# EAGLE board Sche1-panelized (EAGLE 7.2.0)
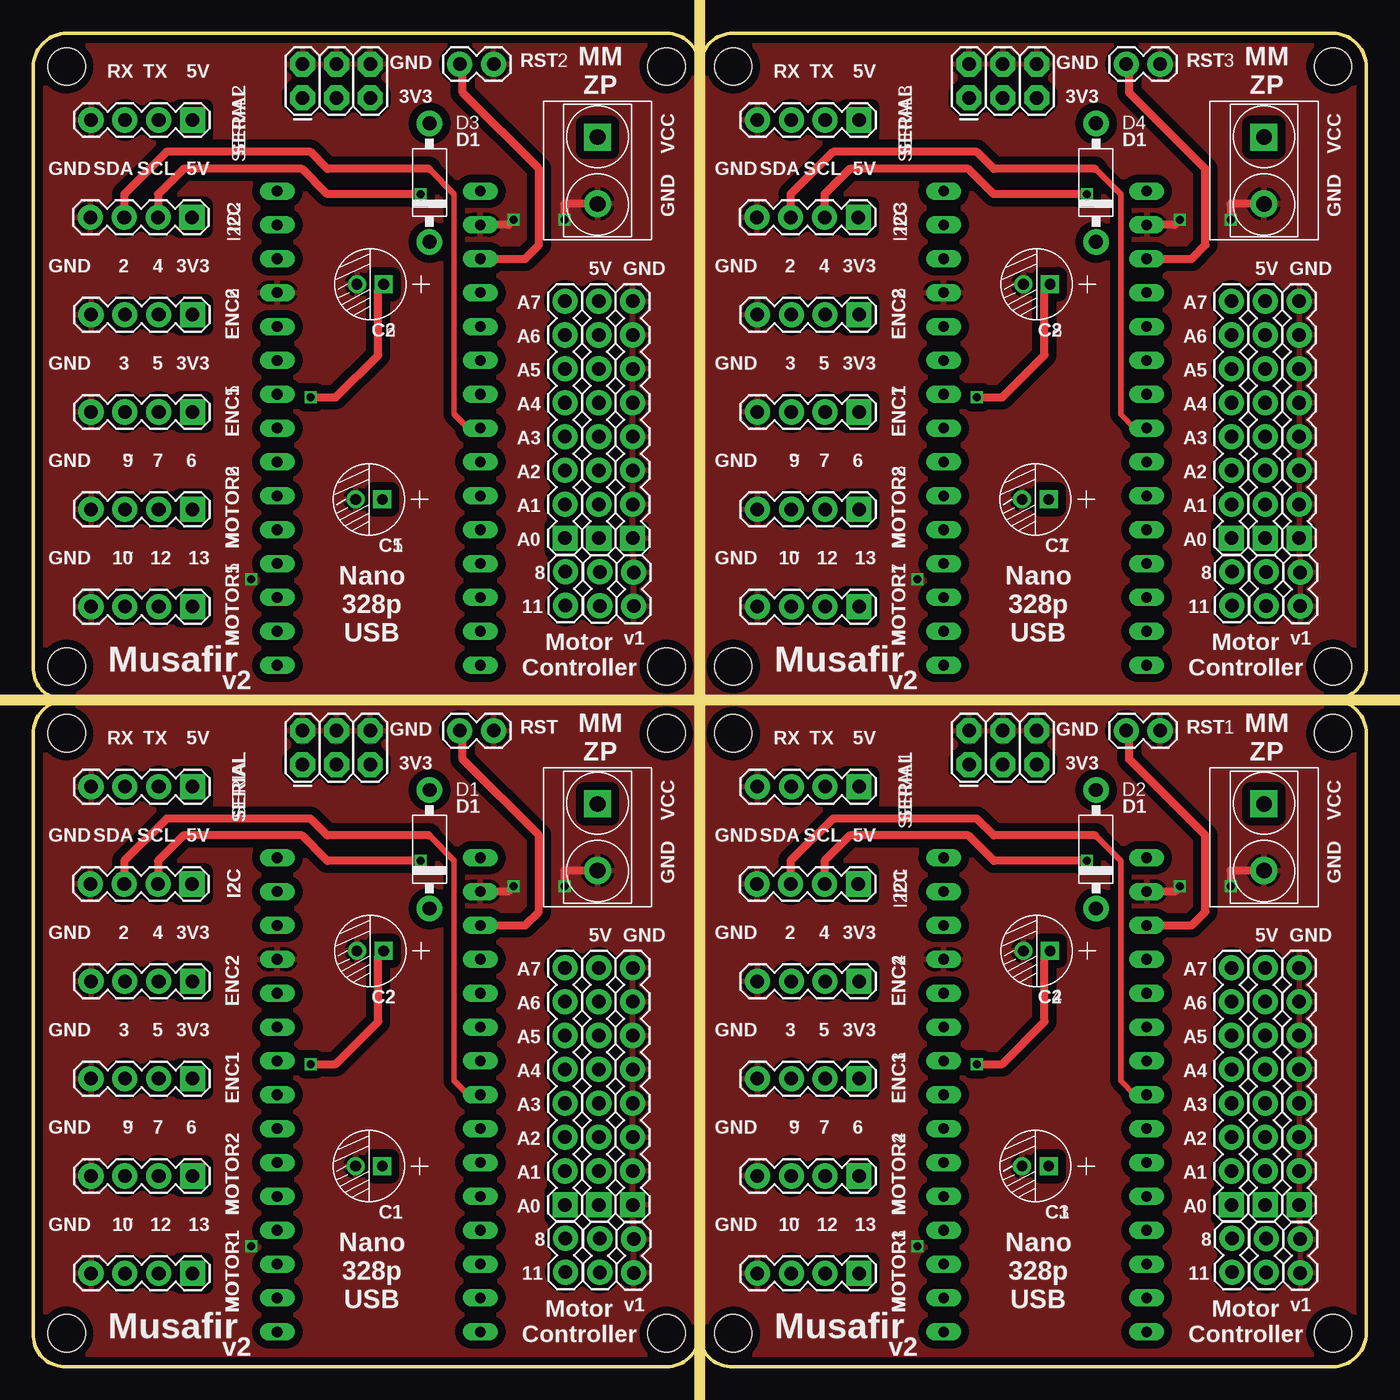
[diagram p0: board, top side]
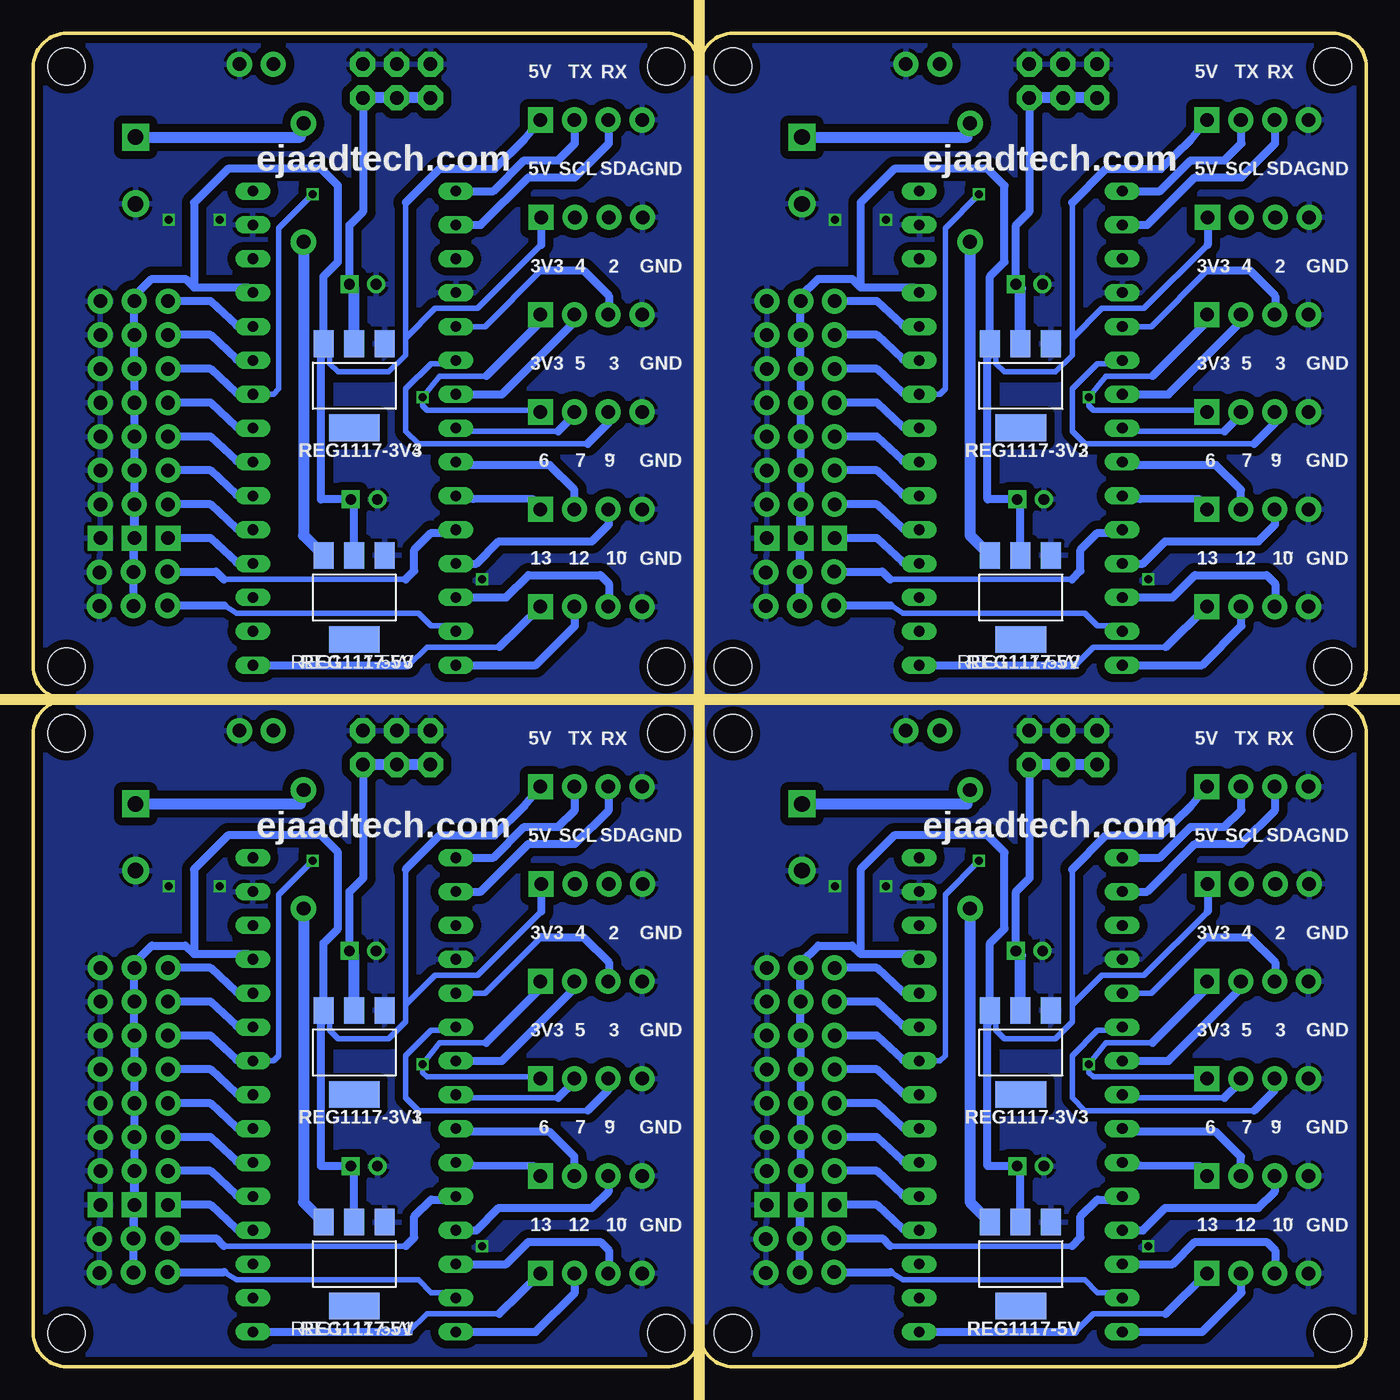
[diagram p1: board, bottom side, seen from below]

Size 100 x 100 mm. Coordinates in mm from the lower left corner, seen from the top.
Outline: 2.5,50 arc90 0,47.5 0,2.5 arc90 2.25,0 47.5,0 arc90 50,2.5 arc90 52.25,0 97.5,0 arc90 100,2.5 100,47.5 arc90 97.5,50 arc90 100,52.5 100,97.5 arc90 97.5,100 52.5,100 arc90 50,97.5 arc90 47.5,100 2.5,100 arc90 0,97.5 0,52.5 arc90 2.25,50 2.5,50
Copper layers (1*16): Top 0.035mm / dielectric 1.5mm / Bottom 0.035mm
Design rules "SeeedStudio_2layer_DRU_no_angle_20140221": minimum track width 6mil, minimum drill 12mil, track to track 6mil, track to pad 6mil, pad to pad 6mil, via to via 6mil, smd to smd 0mil, copper to edge 10mil, drill to drill 10mil, minimum pad ring 10mil, minimum via ring 6mil, stop-mask expansion 2mil, vias tented up to drill 100mil, thermal gap 10mil
Holes 2.8 mm at 2.5,2.5 47.5,2.5 2.5,47.5 47.5,47.5 52.5,2.5 97.5,2.5 52.5,47.5 97.5,47.5 2.5,52.5 47.5,52.5 2.5,97.5 47.5,97.5 52.5,52.5 97.5,52.5 52.5,97.5 97.5,97.5
Milling: 2 lines

## Footprints (pad centres in the part's own frame; a part is rotated, then mirrored left to right if it is on the bottom)
2X3 = drill 1.016 pad 1.88 octagon: 1 0,0; 2 0,2.54; 3 2.54,0; 4 2.54,2.54; 5 5.08,0; 6 5.08,2.54
1X02 = drill 1.016 pad 1.88: 1 0,0; 2 2.54,0
1X08 = drill 1.016 pad 1.88 square: 1 0,0 | drill 1.016 pad 1.88: 2 2.54,0; 3 5.08,0; 4 7.62,0; 5 10.16,0; 6 12.7,0; 7 15.24,0; 8 17.78,0
PC-D5.3MM = drill 0.8 pad 1.35 square: + -1,0 | drill 0.8 pad 1.35: - 1,0
DO-41 = drill 1.041 pad 1.905: 1 -4.445,0; 2 4.445,0
1X04 = drill 1.016 pad 1.88 square: 1 0,0 | drill 1.016 pad 1.88: 2 2.54,0; 3 5.08,0; 4 7.62,0
H2-5.0-10.5X8.0MM = drill 1.168 pad 2.032 square: 1 0,2.5 | drill 1.168 pad 2.032: 2 0,-2.5
SOT223 = smd 1.499 x 2.007: 1 -2.261,-3.15; 2 0.025,-3.15; 3 2.311,-3.15 | smd 3.81 x 2.007: 4 0,3.15
NANO = drill 0.8 long: 3.3V -10.16,24.13; 5V -10.16,-1.27; A0 -10.16,19.05; A1 -10.16,16.51; A2 -10.16,13.97; A3 -10.16,11.43; A4 -10.16,8.89; A5 -10.16,6.35; A6 -10.16,3.81; A7 -10.16,1.27; AREF -10.16,21.59; D2 5.08,1.27; D3 5.08,3.81; D4 5.08,6.35; D5 5.08,8.89; D6 5.08,11.43; D7 5.08,13.97; D8 5.08,16.51; D9 5.08,19.05; D10 5.08,21.59; D11 5.08,24.13; D12 5.08,26.67; D13 -10.16,26.67; GND -10.16,-6.35; GND1 5.08,-1.27; RAW -10.16,-8.89; RST -10.16,-3.81; RST1 5.08,-3.81; RX1 5.08,-6.35; TX0 5.08,-8.89

## Placement (x,y rotation side)
3V3_GND  FEMALE 2x3  [2X3]  20.2,45.16 0 top
3V3_GND1  FEMALE 2x3  [2X3]  70.2,45.16 0 top
3V3_GND2  FEMALE 2x3  [2X3]  20.2,95.16 0 top
3V3_GND3  FEMALE 2x3  [2X3]  70.2,95.16 0 top
5V1  [1X02]  42.5,9.6 270 top
5V2  [1X08]  42.43,12.13 90 top
5V3  [1X02]  92.5,9.6 270 top
5V4  [1X08]  92.43,12.13 90 top
5V5  [1X02]  42.5,59.6 270 top
5V6  [1X08]  42.43,62.13 90 top
5V7  [1X02]  92.5,59.6 270 top
5V8  [1X08]  92.43,62.13 90 top
ANALOG  [1X08]  39.89,12.13 90 top
ANALOG1  [1X08]  89.89,12.13 90 top
ANALOG2  [1X08]  39.89,62.13 90 top
ANALOG3  [1X08]  89.89,62.13 90 top
C1  100uf  [PC-D5.3MM]  25.19,15.04 180 top
C2  100uf  [PC-D5.3MM]  25.28,31.18 180 top
C3  100uf  [PC-D5.3MM]  75.19,15.04 180 top
C4  100uf  [PC-D5.3MM]  75.28,31.18 180 top
C5  100uf  [PC-D5.3MM]  25.19,65.04 180 top
C6  100uf  [PC-D5.3MM]  25.28,81.19 180 top
C7  100uf  [PC-D5.3MM]  75.19,65.04 180 top
C8  100uf  [PC-D5.3MM]  75.28,81.19 180 top
D1  1N4004  [DO-41]  29.73,38.8 270 top
D2  1N4004  [DO-41]  79.73,38.8 270 top
D3  1N4004  [DO-41]  29.73,88.81 270 top
D4  1N4004  [DO-41]  79.73,88.81 270 top
D8D1  [1X02]  89.93,9.63 270 top
D8D2  [1X02]  39.93,59.63 270 top
D8D3  [1X02]  89.93,59.63 270 top
D8D11  [1X02]  39.93,9.63 270 top
ENC1  [1X04]  11.95,21.6 180 top
ENC2  [1X04]  11.95,28.9 180 top
ENC3  [1X04]  61.95,21.6 180 top
ENC4  [1X04]  61.95,28.9 180 top
ENC5  [1X04]  11.95,71.6 180 top
ENC6  [1X04]  11.95,78.9 180 top
ENC7  [1X04]  61.95,71.6 180 top
ENC8  [1X04]  61.95,78.9 180 top
GND1  [1X02]  45.04,9.57 270 top
GND2  [1X08]  44.97,12.13 90 top
GND3  [1X02]  95.04,9.57 270 top
GND4  [1X08]  94.97,12.13 90 top
GND5  [1X02]  45.04,59.57 270 top
GND6  [1X08]  44.97,62.13 90 top
GND7  [1X02]  95.04,59.57 270 top
GND8  [1X08]  94.97,62.13 90 top
I2C  [1X04]  11.9,36.2 180 top
I2C1  [1X04]  61.9,36.2 180 top
I2C2  [1X04]  11.9,86.2 180 top
I2C3  [1X04]  61.9,86.2 180 top
MOTOR1  [1X04]  11.95,7 180 top
MOTOR2  [1X04]  11.95,14.3 180 top
MOTOR3  [1X04]  61.95,7 180 top
MOTOR4  [1X04]  61.95,14.3 180 top
MOTOR5  [1X04]  11.95,57 180 top
MOTOR6  [1X04]  11.95,64.3 180 top
MOTOR7  [1X04]  61.95,57 180 top
MOTOR8  [1X04]  61.95,64.3 180 top
POWER  GREEN-2P-5.0  [H2-5.0-10.5X8.0MM]  42.33,39.71 0 top
POWER1  GREEN-2P-5.0  [H2-5.0-10.5X8.0MM]  92.33,39.71 0 top
POWER2  GREEN-2P-5.0  [H2-5.0-10.5X8.0MM]  42.33,89.71 0 top
POWER3  GREEN-2P-5.0  [H2-5.0-10.5X8.0MM]  92.33,89.71 0 top
REG1117-3V1  REG1117  [SOT223]  75.92,23.57 180 bottom
REG1117-3V2  REG1117  [SOT223]  25.92,73.56 180 bottom
REG1117-3V3  REG1117  [SOT223]  25.92,23.57 180 bottom
REG1117-3V4  REG1117  [SOT223]  75.92,73.56 180 bottom
REG1117-5V  REG1117  [SOT223]  25.92,7.69 180 bottom
REG1117-5V1  REG1117  [SOT223]  75.92,7.69 180 bottom
REG1117-5V2  REG1117  [SOT223]  25.92,57.69 180 bottom
REG1117-5V3  REG1117  [SOT223]  75.92,57.69 180 bottom
RST  [1X02]  32,47.7 0 top
RST1  [1X02]  82,47.7 0 top
RST2  [1X02]  32,97.69 0 top
RST3  [1X02]  82,97.69 0 top
SERIAL  [1X04]  11.95,43.5 180 top
SERIAL1  [1X04]  61.95,43.5 180 top
SERIAL2  [1X04]  11.95,93.5 180 top
SERIAL3  [1X04]  61.95,93.5 180 top
U$1  NANO  [NANO]  23.38,29.28 180 top
U$2  NANO  [NANO]  73.38,29.28 180 top
U$3  NANO  [NANO]  23.38,79.28 180 top
U$4  NANO  [NANO]  73.38,79.28 180 top

## Library data of the parts
3V3_GND 3V3_GND1-3V3_GND3 = SparkFun-Connectors; PROD_ID: CONN-11566
5V1 5V3 5V5 5V7 D8D1-D8D3 D8D11 GND1 GND3 GND5 GND7 RST RST1-RST3 = SparkFun-Connectors
5V2 5V4 5V6 5V8 ANALOG ANALOG1-ANALOG3 GND2 GND4 GND6 GND8 = SparkFun-Connectors; PROD_ID: CONN-08438
C1-C8 = Seeed-Capacitor-2016; MPN: KS 100uF/16V
D1-D4 = Seeed-Diode-2016; MPN: 1N4004
ENC1-ENC8 I2C I2C1-I2C3 MOTOR1-MOTOR8 SERIAL SERIAL1-SERIAL3 = SparkFun-Connectors; PROD_ID: CONN-09696
POWER POWER1-POWER3 = Seeed-Connector -2016
REG1117-3V1-REG1117-3V4 REG1117-5V REG1117-5V1-REG1117-5V3 = burr-brown; MPN: REG1117; OC_FARNELL: 1097566; OC_NEWARK: 14P6981
U$1-U$4 = Arduino-clone

## Nets
3V1: 3V3_GND1.1 3V3_GND1.3 3V3_GND1.5 C4.+ ENC3.1 ENC4.1 REG1117-3V1.2
3V2: 3V3_GND2.1 3V3_GND2.3 3V3_GND2.5 C6.+ ENC5.1 ENC6.1 REG1117-3V2.2
3V3: 3V3_GND.1 3V3_GND.3 3V3_GND.5 C2.+ ENC1.1 ENC2.1 REG1117-3V3.2
3V4: 3V3_GND3.1 3V3_GND3.3 3V3_GND3.5 C8.+ ENC7.1 ENC8.1 REG1117-3V4.2
5V: 5V1.1 5V1.2 5V2.1 5V2.2 5V2.3 5V2.4 5V2.5 5V2.6 5V2.7 5V2.8 C1.+ I2C.1 REG1117-3V3.3 REG1117-5V.2 SERIAL.1 U$1.5V
5V1: 5V3.1 5V3.2 5V4.1 5V4.2 5V4.3 5V4.4 5V4.5 5V4.6 5V4.7 5V4.8 C3.+ I2C1.1 REG1117-3V1.3 REG1117-5V1.2 SERIAL1.1 U$2.5V
5V2: 5V5.1 5V5.2 5V6.1 5V6.2 5V6.3 5V6.4 5V6.5 5V6.6 5V6.7 5V6.8 C5.+ I2C2.1 REG1117-3V2.3 REG1117-5V2.2 SERIAL2.1 U$3.5V
5V3: 5V7.1 5V7.2 5V8.1 5V8.2 5V8.3 5V8.4 5V8.5 5V8.6 5V8.7 5V8.8 C7.+ I2C3.1 REG1117-3V4.3 REG1117-5V3.2 SERIAL3.1 U$4.5V
A0: ANALOG.1 U$1.A0
A1: ANALOG.2 U$1.A1
A2: ANALOG.3 U$1.A2
A3: ANALOG.4 U$1.A3
A4: ANALOG.5 I2C.3 U$1.A4
A5: ANALOG.6 I2C.2 U$1.A5
A6: ANALOG.7 U$1.A6
A7: ANALOG.8 U$1.A7
A8: ANALOG1.6 I2C1.2 U$2.A5
A9: ANALOG1.5 I2C1.3 U$2.A4
A10: ANALOG1.1 U$2.A0
A11: ANALOG1.2 U$2.A1
A12: ANALOG1.3 U$2.A2
A13: ANALOG1.4 U$2.A3
A14: ANALOG1.7 U$2.A6
A15: ANALOG1.8 U$2.A7
A16: ANALOG2.6 I2C2.2 U$3.A5
A17: ANALOG2.5 I2C2.3 U$3.A4
A18: ANALOG2.1 U$3.A0
A19: ANALOG2.2 U$3.A1
A20: ANALOG2.3 U$3.A2
A21: ANALOG2.4 U$3.A3
A22: ANALOG2.7 U$3.A6
A23: ANALOG2.8 U$3.A7
A24: ANALOG3.6 I2C3.2 U$4.A5
A25: ANALOG3.5 I2C3.3 U$4.A4
A26: ANALOG3.1 U$4.A0
A27: ANALOG3.2 U$4.A1
A28: ANALOG3.3 U$4.A2
A29: ANALOG3.4 U$4.A3
A30: ANALOG3.7 U$4.A6
A31: ANALOG3.8 U$4.A7
D1: MOTOR3.3 U$2.D10
D2: ENC2.3 U$1.D2
D3: ENC1.3 U$1.D3
D4: ENC2.2 U$1.D4
D5: ENC1.2 U$1.D5
D6: MOTOR2.2 U$1.D6
D7: MOTOR2.1 U$1.D7
D8: D8D11.1 U$1.D8
D9: MOTOR2.3 U$1.D9
D10: MOTOR1.3 U$1.D10
D11: D8D11.2 U$1.D11
D12: MOTOR1.2 U$1.D12
D13: MOTOR1.1 U$1.D13
D14: MOTOR3.2 U$2.D12
D15: MOTOR3.1 U$2.D13
D16: MOTOR4.1 U$2.D7
D17: MOTOR4.2 U$2.D6
D18: MOTOR4.3 U$2.D9
D19: ENC3.2 U$2.D5
D20: ENC3.3 U$2.D3
D21: ENC4.2 U$2.D4
D22: ENC4.3 U$2.D2
D23: D8D1.1 U$2.D8
D24: D8D1.2 U$2.D11
D25: MOTOR5.3 U$3.D10
D26: MOTOR5.2 U$3.D12
D27: MOTOR5.1 U$3.D13
D28: MOTOR6.1 U$3.D7
D29: MOTOR6.2 U$3.D6
D30: MOTOR6.3 U$3.D9
D31: ENC5.2 U$3.D5
D32: ENC5.3 U$3.D3
D33: ENC6.2 U$3.D4
D34: ENC6.3 U$3.D2
D35: D8D2.1 U$3.D8
D36: D8D2.2 U$3.D11
D37: MOTOR7.3 U$4.D10
D38: MOTOR7.2 U$4.D12
D39: MOTOR7.1 U$4.D13
D40: MOTOR8.1 U$4.D7
D41: MOTOR8.2 U$4.D6
D42: MOTOR8.3 U$4.D9
D43: ENC7.2 U$4.D5
D44: ENC7.3 U$4.D3
D45: ENC8.2 U$4.D4
D46: ENC8.3 U$4.D2
D47: D8D3.1 U$4.D8
D48: D8D3.2 U$4.D11
GND: 3V3_GND1.2 3V3_GND1.4 3V3_GND1.6 3V3_GND2.2 3V3_GND2.4 3V3_GND2.6 3V3_GND3.2 3V3_GND3.4 3V3_GND3.6 3V3_GND.2 3V3_GND.4 3V3_GND.6 C1.- C2.- C3.- C4.- C5.- C6.- C7.- C8.- ENC1.4 ENC2.4 ENC3.4 ENC4.4 ENC5.4 ENC6.4 ENC7.4 ENC8.4 GND1.1 GND1.2 GND2.1 GND2.2 GND2.3 GND2.4 GND2.5 GND2.6 GND2.7 GND2.8 GND3.1 GND3.2 GND4.1 GND4.2 GND4.3 GND4.4 GND4.5 GND4.6 GND4.7 GND4.8 GND5.1 GND5.2 GND6.1 GND6.2 GND6.3 GND6.4 GND6.5 GND6.6 GND6.7 GND6.8 GND7.1 GND7.2 GND8.1 GND8.2 GND8.3 GND8.4 GND8.5 GND8.6 GND8.7 GND8.8 I2C1.4 I2C2.4 I2C3.4 I2C.4 MOTOR1.4 MOTOR2.4 MOTOR3.4 MOTOR4.4 MOTOR5.4 MOTOR6.4 MOTOR7.4 MOTOR8.4 POWER1.2 POWER2.2 POWER3.2 POWER.2 REG1117-3V1.1 REG1117-3V2.1 REG1117-3V3.1 REG1117-3V4.1 REG1117-5V1.1 REG1117-5V2.1 REG1117-5V3.1 REG1117-5V.1 RST1.2 RST2.2 RST3.2 RST.2 SERIAL1.4 SERIAL2.4 SERIAL3.4 SERIAL.4 U$1.GND U$1.GND1 U$2.GND U$2.GND1 U$3.GND U$3.GND1 U$4.GND U$4.GND1
N$1: D1.1 POWER.1
N$3: D2.1 POWER1.1
N$4: D3.1 POWER2.1
N$5: D4.1 POWER3.1
RST: RST.1 U$1.RST
RST1: RST1.1 U$2.RST
RST2: RST2.1 U$3.RST
RST3: RST3.1 U$4.RST
RX: SERIAL.3 U$1.RX1
RX1: SERIAL1.3 U$2.RX1
RX2: SERIAL2.3 U$3.RX1
RX3: SERIAL3.3 U$4.RX1
TX: SERIAL.2 U$1.TX0
TX1: SERIAL1.2 U$2.TX0
TX2: SERIAL2.2 U$3.TX0
TX3: SERIAL3.2 U$4.TX0
VCC: D1.2 REG1117-5V.3
VCC1: D2.2 REG1117-5V1.3
VCC2: D3.2 REG1117-5V2.3
VCC3: D4.2 REG1117-5V3.3

## Tracks (layer width: path | path; a pad name or v marks a point on that pad's centre or on a via)
3V1  (via drill 0.6)
  Top 0.406: 75.87,30.77 C4.+
  Top 0.61: v70.79,22.7 72.7,22.7 75.87,25.87 75.87,30.77
  Bottom 0.406: 66.03,24.28 69.52,24.28 v70.79,22.7 70.79,22.06 70.47,21.74 62.18,21.74
  Bottom 0.61: ENC4.1 61.95,28.36 66.03,24.28 | 62.18,21.74 ENC3.1 | C4.+ 76.28,35.62 75.24,36.66 75.24,45.11 | 75.24,45.11 3V3_GND1.5 | 75.24,45.11 72.74,45.11 3V3_GND1.3
  Bottom 0.813: 3V3_GND1.1 3V3_GND1.3 3V3_GND1.5 | REG1117-3V1.2 75.94,30.84 C4.+
3V2  (via drill 0.6)
  Top 0.406: 25.87,80.78 C6.+
  Top 0.61: v20.79,72.69 22.7,72.69 25.87,75.87 25.87,80.78
  Bottom 0.406: 16.03,74.28 19.52,74.28 v20.79,72.69 20.79,72.06 20.47,71.74 12.18,71.74
  Bottom 0.61: ENC6.1 11.95,78.36 16.03,74.28 | 12.18,71.74 ENC5.1 | C6.+ 26.28,85.62 25.24,86.67 25.24,95.11 | 25.24,95.11 3V3_GND2.5 | 25.24,95.11 22.74,95.11 3V3_GND2.3
  Bottom 0.813: 3V3_GND2.1 3V3_GND2.3 3V3_GND2.5 | REG1117-3V2.2 25.94,80.84 C6.+
3V3  (via drill 0.6)
  Top 0.406: 25.87,30.77 C2.+
  Top 0.61: v20.79,22.7 22.7,22.7 25.87,25.87 25.87,30.77
  Bottom 0.406: 16.03,24.28 19.52,24.28 v20.79,22.7 20.79,22.06 20.47,21.74 12.18,21.74
  Bottom 0.61: ENC2.1 11.95,28.36 16.03,24.28 | 12.18,21.74 ENC1.1 | C2.+ 26.28,35.62 25.24,36.66 25.24,45.11 | 25.24,45.11 3V3_GND.5 | 25.24,45.11 22.74,45.11 3V3_GND.3
  Bottom 0.813: 3V3_GND.1 3V3_GND.3 3V3_GND.5 | REG1117-3V3.2 25.94,30.84 C2.+
3V4  (via drill 0.6)
  Top 0.406: 75.87,80.78 C8.+
  Top 0.61: v70.79,72.69 72.7,72.69 75.87,75.87 75.87,80.78
  Bottom 0.406: 66.03,74.28 69.52,74.28 v70.79,72.69 70.79,72.06 70.47,71.74 62.18,71.74
  Bottom 0.61: ENC8.1 61.95,78.36 66.03,74.28 | 62.18,71.74 ENC7.1 | C8.+ 76.28,85.62 75.24,86.67 75.24,95.11 | 75.24,95.11 3V3_GND3.5 | 75.24,95.11 72.74,95.11 3V3_GND3.3
  Bottom 0.813: 3V3_GND3.1 3V3_GND3.3 3V3_GND3.5 | REG1117-3V4.2 75.94,80.84 C8.+
5V
  Bottom 0.406: REG1117-3V3.3 27.78,26.9 27.78,25.23 27.14,24.6 23.33,24.6 22.06,25.87 22.06,27.14 | 11.9,34.13 16.66,29.36 19.84,29.36 22.06,27.14 | 22.06,27.14 22.06,37.3
  Bottom 0.61: 5V2.1 5V2.2 | SERIAL.1 13.17,42.02 15.39,39.84 19.52,39.84 22.06,37.3 | 5V2.1 42.5,12.13 5V1.1 | 5V1.1 5V1.2 | 37.94,30.95 38.57,31.59 41.11,31.59 42.43,30.27 5V2.8 5V2.7 5V2.6 5V2.5 5V2.4 5V2.3 5V2.2 | 37.94,30.95 33.94,30.95 U$1.5V | REG1117-5V.2 25.94,14.79 C1.+ 28.41,15.04 28.41,25.87 28.23,25.87 REG1117-3V3.3 28.23,31.77 27.14,32.85 27.14,38.57 28.41,39.84 35.4,39.84 37.94,37.3 37.94,30.95 | I2C.1 11.9,34.13 | 5V2.2 42.38,14.68 42.38,11.9 | 5V1.1 42.43,9.6 5V2.1
5V1
  Bottom 0.406: REG1117-3V1.3 77.78,26.9 77.78,25.23 77.14,24.6 73.33,24.6 72.06,25.87 72.06,27.14 | 61.9,34.13 66.66,29.36 69.84,29.36 72.06,27.14 | 72.06,27.14 72.06,37.3
  Bottom 0.61: 5V4.1 5V4.2 | SERIAL1.1 63.17,42.02 65.39,39.84 69.52,39.84 72.06,37.3 | 5V4.1 92.5,12.13 5V3.1 | 5V3.1 5V3.2 | 87.94,30.95 88.57,31.59 91.11,31.59 92.43,30.27 5V4.8 5V4.7 5V4.6 5V4.5 5V4.4 5V4.3 5V4.2 | 87.94,30.95 83.94,30.95 U$2.5V | REG1117-5V1.2 75.94,14.79 C3.+ 78.41,15.04 78.41,25.87 78.23,25.87 REG1117-3V1.3 78.23,31.77 77.14,32.85 77.14,38.57 78.41,39.84 85.4,39.84 87.94,37.3 87.94,30.95 | I2C1.1 61.9,34.13 | 5V4.2 92.38,14.68 92.38,11.9 | 5V3.1 92.43,9.6 5V4.1
5V2
  Bottom 0.406: REG1117-3V2.3 27.78,76.9 27.78,75.23 27.14,74.6 23.33,74.6 22.06,75.87 22.06,77.14 | 11.9,84.13 16.66,79.36 19.84,79.36 22.06,77.14 | 22.06,77.14 22.06,87.3
  Bottom 0.61: 5V6.1 5V6.2 | SERIAL2.1 13.17,92.03 15.39,89.84 19.52,89.84 22.06,87.3 | 5V6.1 42.5,62.13 5V5.1 | 5V5.1 5V5.2 | 37.94,80.95 38.57,81.58 41.11,81.58 42.43,80.27 5V6.8 5V6.7 5V6.6 5V6.5 5V6.4 5V6.3 5V6.2 | 37.94,80.95 33.94,80.95 U$3.5V | REG1117-5V2.2 25.94,64.8 C5.+ 28.41,65.04 28.41,75.87 28.23,75.87 REG1117-3V2.3 28.23,81.77 27.14,82.86 27.14,88.57 28.41,89.84 35.4,89.84 37.94,87.3 37.94,80.95 | I2C2.1 11.9,84.13 | 5V6.2 42.38,64.67 42.38,61.9 | 5V5.1 42.43,59.6 5V6.1
5V3
  Bottom 0.406: REG1117-3V4.3 77.78,76.9 77.78,75.23 77.14,74.6 73.33,74.6 72.06,75.87 72.06,77.14 | 61.9,84.13 66.66,79.36 69.84,79.36 72.06,77.14 | 72.06,77.14 72.06,87.3
  Bottom 0.61: 5V8.1 5V8.2 | SERIAL3.1 63.17,92.03 65.39,89.84 69.52,89.84 72.06,87.3 | 5V8.1 92.5,62.13 5V7.1 | 5V7.1 5V7.2 | 87.94,80.95 88.57,81.58 91.11,81.58 92.43,80.27 5V8.8 5V8.7 5V8.6 5V8.5 5V8.4 5V8.3 5V8.2 | 87.94,80.95 83.94,80.95 U$4.5V | REG1117-5V3.2 75.94,64.8 C7.+ 78.41,65.04 78.41,75.87 78.23,75.87 REG1117-3V4.3 78.23,81.77 77.14,82.86 77.14,88.57 78.41,89.84 85.4,89.84 87.94,87.3 87.94,80.95 | I2C3.1 61.9,84.13 | 5V8.2 92.38,64.67 92.38,61.9 | 5V7.1 92.43,59.6 5V8.1
A0
  Bottom 0.61: U$1.A0 34.76,10.31 36.71,12.13 ANALOG.1
A1
  Bottom 0.61: U$1.A1 34.76,12.85 36.71,14.68 ANALOG.2
A2
  Bottom 0.61: U$1.A2 34.76,15.39 36.71,17.21 ANALOG.3
A3
  Bottom 0.61: U$1.A3 34.76,17.93 36.71,19.75 ANALOG.4
A4
  Top 0.406: U$1.A4 32.62,20.39 31.59,21.43 31.59,37.94 29.68,39.84 | 6.82,36 I2C.3
  Top 0.61: 29.68,39.84 22.06,39.84 20.79,41.11 10,41.11 6.82,37.94 6.82,36
  Bottom 0.61: U$1.A4 34.76,20.47 36.71,22.3 ANALOG.5
A5  (via drill 0.6)
  Top 0.406: 9.36,36 I2C.2
  Top 0.61: v29.05,37.94 22.06,37.94 20.16,39.84 11.27,39.84 9.36,37.94 9.36,36
  Bottom 0.406: U$1.A5 31.99,22.93 31.59,23.33 31.59,35.4 v29.05,37.94
  Bottom 0.61: U$1.A5 34.76,23.01 36.71,24.84 ANALOG.6
A6
  Bottom 0.61: U$1.A6 34.76,25.55 36.71,27.38 ANALOG.7
A7
  Bottom 0.61: U$1.A7 34.76,28.09 36.71,29.91 ANALOG.8
A8  (via drill 0.6)
  Top 0.406: 59.36,36 I2C1.2
  Top 0.61: v79.05,37.94 72.06,37.94 70.16,39.84 61.27,39.84 59.36,37.94 59.36,36
  Bottom 0.406: U$2.A5 81.99,22.93 81.59,23.33 81.59,35.4 v79.05,37.94
  Bottom 0.61: U$2.A5 84.76,23.01 86.71,24.84 ANALOG1.6
A9
  Top 0.406: U$2.A4 82.62,20.39 81.59,21.43 81.59,37.94 79.68,39.84 | 56.82,36 I2C1.3
  Top 0.61: 79.68,39.84 72.06,39.84 70.79,41.11 60,41.11 56.82,37.94 56.82,36
  Bottom 0.61: U$2.A4 84.76,20.47 86.71,22.3 ANALOG1.5
A10
  Bottom 0.61: U$2.A0 84.76,10.31 86.71,12.13 ANALOG1.1
A11
  Bottom 0.61: U$2.A1 84.76,12.85 86.71,14.68 ANALOG1.2
A12
  Bottom 0.61: U$2.A2 84.76,15.39 86.71,17.21 ANALOG1.3
A13
  Bottom 0.61: U$2.A3 84.76,17.93 86.71,19.75 ANALOG1.4
A14
  Bottom 0.61: U$2.A6 84.76,25.55 86.71,27.38 ANALOG1.7
A15
  Bottom 0.61: U$2.A7 84.76,28.09 86.71,29.91 ANALOG1.8
A16  (via drill 0.6)
  Top 0.406: 9.36,86 I2C2.2
  Top 0.61: v29.05,87.94 22.06,87.94 20.16,89.84 11.27,89.84 9.36,87.94 9.36,86
  Bottom 0.406: U$3.A5 31.99,72.93 31.59,73.33 31.59,85.39 v29.05,87.94
  Bottom 0.61: U$3.A5 34.76,73.01 36.71,74.83 ANALOG2.6
A17
  Top 0.406: U$3.A4 32.62,70.39 31.59,71.42 31.59,87.94 29.68,89.84 | 6.82,86 I2C2.3
  Top 0.61: 29.68,89.84 22.06,89.84 20.79,91.11 10,91.11 6.82,87.94 6.82,86
  Bottom 0.61: U$3.A4 34.76,70.47 36.71,72.3 ANALOG2.5
A18
  Bottom 0.61: U$3.A0 34.76,60.31 36.71,62.13 ANALOG2.1
A19
  Bottom 0.61: U$3.A1 34.76,62.85 36.71,64.67 ANALOG2.2
A20
  Bottom 0.61: U$3.A2 34.76,65.39 36.71,67.22 ANALOG2.3
A21
  Bottom 0.61: U$3.A3 34.76,67.93 36.71,69.75 ANALOG2.4
A22
  Bottom 0.61: U$3.A6 34.76,75.55 36.71,77.38 ANALOG2.7
A23
  Bottom 0.61: U$3.A7 34.76,78.09 36.71,79.92 ANALOG2.8
A24  (via drill 0.6)
  Top 0.406: 59.36,86 I2C3.2
  Top 0.61: v79.05,87.94 72.06,87.94 70.16,89.84 61.27,89.84 59.36,87.94 59.36,86
  Bottom 0.406: U$4.A5 81.99,72.93 81.59,73.33 81.59,85.39 v79.05,87.94
  Bottom 0.61: U$4.A5 84.76,73.01 86.71,74.83 ANALOG3.6
A25
  Top 0.406: U$4.A4 82.62,70.39 81.59,71.42 81.59,87.94 79.68,89.84 | 56.82,86 I2C3.3
  Top 0.61: 79.68,89.84 72.06,89.84 70.79,91.11 60,91.11 56.82,87.94 56.82,86
  Bottom 0.61: U$4.A4 84.76,70.47 86.71,72.3 ANALOG3.5
A26
  Bottom 0.61: U$4.A0 84.76,60.31 86.71,62.13 ANALOG3.1
A27
  Bottom 0.61: U$4.A1 84.76,62.85 86.71,64.67 ANALOG3.2
A28
  Bottom 0.61: U$4.A2 84.76,65.39 86.71,67.22 ANALOG3.3
A29
  Bottom 0.61: U$4.A3 84.76,67.93 86.71,69.75 ANALOG3.4
A30
  Bottom 0.61: U$4.A6 84.76,75.55 86.71,77.38 ANALOG3.7
A31
  Bottom 0.61: U$4.A7 84.76,78.09 86.71,79.92 ANALOG3.8
D1
  Bottom 0.406: 56.82,7.74 MOTOR3.3
  Bottom 0.61: U$2.D10 64.52,7.69 62.85,9.36 57.46,9.36 56.82,8.72 56.82,7.74
D2
  Bottom 0.406: U$1.D2 16.11,28.01 11.9,32.22 | 6.82,29.32 ENC2.3
  Bottom 0.61: 11.9,32.22 8.73,32.22 6.82,30.32 6.82,29.32
D3
  Bottom 0.406: 8.41,19.2 21.11,19.2 22.06,20.16 22.06,23.33 20.16,25.23 18.53,25.23 U$1.D3
  Bottom 0.61: ENC1.3 6.87,20.75 8.41,19.2
D4
  Bottom 0.406: 9.36,29.23 ENC2.2
  Bottom 0.61: U$1.D4 14.84,22.93 9.36,28.41 9.36,29.23
D5
  Bottom 0.406: 10.63,20.16 18.06,20.16 U$1.D5
  Bottom 0.61: ENC1.2 9.41,21.38 10.63,20.16
D6
  Bottom 0.61: MOTOR2.2 9.41,15.76 11.27,17.61 18.06,17.61 U$1.D6
D7
  Bottom 0.61: MOTOR2.1 12.5,15.04 16.98,15.07 18.06,15.07 U$1.D7
D8
  Bottom 0.406: 35.71,9.04 22.06,9.04
  Bottom 0.61: D8D11.1 36.3,9.63 35.71,9.04 | 22.06,9.04 21.43,9.68 21.43,11.27 20.16,12.54 19.17,12.54 U$1.D8
D9
  Bottom 0.61: U$1.D9 16.76,10.23 15.08,11.9 8.09,11.9 6.82,13.17 MOTOR2.3
D10
  Bottom 0.406: 6.82,7.74 MOTOR1.3
  Bottom 0.61: U$1.D10 14.52,7.69 12.85,9.36 7.46,9.36 6.82,8.72 6.82,7.74
D11
  Bottom 0.406: 35.66,7.09 34.76,6.5 21.11,6.5 20.16,5.55 18.7,5.55 U$1.D11
  Bottom 0.61: D8D11.2 35.66,7.09
D12
  Bottom 0.406: 9.36,7.64 MOTOR1.2
  Bottom 0.61: U$1.D12 12.3,2.61 9.36,5.55 9.36,7.64
D13
  Bottom 0.406: 21.83,2.61 20.47,3.96 15.04,3.96
  Bottom 0.61: U$1.D13 21.83,2.61 | 15.04,3.96 MOTOR1.1
D14
  Bottom 0.406: 59.36,7.64 MOTOR3.2
  Bottom 0.61: U$2.D12 62.3,2.61 59.36,5.55 59.36,7.64
D15
  Bottom 0.406: 71.83,2.61 70.47,3.96 65.04,3.96
  Bottom 0.61: U$2.D13 71.83,2.61 | 65.04,3.96 MOTOR3.1
D16
  Bottom 0.61: MOTOR4.1 62.5,15.04 66.98,15.07 68.06,15.07 U$2.D7
D17
  Bottom 0.61: MOTOR4.2 59.41,15.76 61.27,17.61 68.06,17.61 U$2.D6
D18
  Bottom 0.61: U$2.D9 66.76,10.23 65.08,11.9 58.09,11.9 56.82,13.17 MOTOR4.3
D19
  Bottom 0.406: 60.63,20.16 68.06,20.16 U$2.D5
  Bottom 0.61: ENC3.2 59.41,21.38 60.63,20.16
D20
  Bottom 0.406: 58.41,19.2 71.11,19.2 72.06,20.16 72.06,23.33 70.16,25.23 68.53,25.23 U$2.D3
  Bottom 0.61: ENC3.3 56.87,20.75 58.41,19.2
D21
  Bottom 0.406: 59.36,29.23 ENC4.2
  Bottom 0.61: U$2.D4 64.84,22.93 59.36,28.41 59.36,29.23
D22
  Bottom 0.406: U$2.D2 66.11,28.01 61.9,32.22 | 56.82,29.32 ENC4.3
  Bottom 0.61: 61.9,32.22 58.73,32.22 56.82,30.32 56.82,29.32
D23
  Bottom 0.406: 85.71,9.04 72.06,9.04
  Bottom 0.61: D8D1.1 86.3,9.63 85.71,9.04 | 72.06,9.04 71.43,9.68 71.43,11.27 70.16,12.54 69.17,12.54 U$2.D8
D24
  Bottom 0.406: 85.66,7.09 84.76,6.5 71.11,6.5 70.16,5.55 68.7,5.55 U$2.D11
  Bottom 0.61: D8D1.2 85.66,7.09
D25
  Bottom 0.406: 6.82,57.73 MOTOR5.3
  Bottom 0.61: U$3.D10 14.52,57.69 12.85,59.36 7.46,59.36 6.82,58.73 6.82,57.73
D26
  Bottom 0.406: 9.36,57.65 MOTOR5.2
  Bottom 0.61: U$3.D12 12.3,52.61 9.36,55.55 9.36,57.65
D27
  Bottom 0.406: 21.83,52.61 20.47,53.96 15.04,53.96
  Bottom 0.61: U$3.D13 21.83,52.61 | 15.04,53.96 MOTOR5.1
D28
  Bottom 0.61: MOTOR6.1 12.5,65.04 16.98,65.08 18.06,65.08 U$3.D7
D29
  Bottom 0.61: MOTOR6.2 9.41,65.75 11.27,67.61 18.06,67.61 U$3.D6
D30
  Bottom 0.61: U$3.D9 16.76,60.23 15.08,61.9 8.09,61.9 6.82,63.17 MOTOR6.3
D31
  Bottom 0.406: 10.63,70.16 18.06,70.16 U$3.D5
  Bottom 0.61: ENC5.2 9.41,71.38 10.63,70.16
D32
  Bottom 0.406: 8.41,69.2 21.11,69.2 22.06,70.16 22.06,73.33 20.16,75.23 18.53,75.23 U$3.D3
  Bottom 0.61: ENC5.3 6.87,70.75 8.41,69.2
D33
  Bottom 0.406: 9.36,79.23 ENC6.2
  Bottom 0.61: U$3.D4 14.84,72.93 9.36,78.41 9.36,79.23
D34
  Bottom 0.406: U$3.D2 16.11,78.01 11.9,82.22 | 6.82,79.33 ENC6.3
  Bottom 0.61: 11.9,82.22 8.73,82.22 6.82,80.31 6.82,79.33
D35
  Bottom 0.406: 35.71,59.04 22.06,59.04
  Bottom 0.61: D8D2.1 36.3,59.63 35.71,59.04 | 22.06,59.04 21.43,59.68 21.43,61.27 20.16,62.53 19.17,62.53 U$3.D8
D36
  Bottom 0.406: 35.66,57.09 34.76,56.5 21.11,56.5 20.16,55.55 18.7,55.55 U$3.D11
  Bottom 0.61: D8D2.2 35.66,57.09
D37
  Bottom 0.406: 56.82,57.73 MOTOR7.3
  Bottom 0.61: U$4.D10 64.52,57.69 62.85,59.36 57.46,59.36 56.82,58.73 56.82,57.73
D38
  Bottom 0.406: 59.36,57.65 MOTOR7.2
  Bottom 0.61: U$4.D12 62.3,52.61 59.36,55.55 59.36,57.65
D39
  Bottom 0.406: 71.83,52.61 70.47,53.96 65.04,53.96
  Bottom 0.61: U$4.D13 71.83,52.61 | 65.04,53.96 MOTOR7.1
D40
  Bottom 0.61: MOTOR8.1 62.5,65.04 66.98,65.08 68.06,65.08 U$4.D7
D41
  Bottom 0.61: MOTOR8.2 59.41,65.75 61.27,67.61 68.06,67.61 U$4.D6
D42
  Bottom 0.61: U$4.D9 66.76,60.23 65.08,61.9 58.09,61.9 56.82,63.17 MOTOR8.3
D43
  Bottom 0.406: 60.63,70.16 68.06,70.16 U$4.D5
  Bottom 0.61: ENC7.2 59.41,71.38 60.63,70.16
D44
  Bottom 0.406: 58.41,69.2 71.11,69.2 72.06,70.16 72.06,73.33 70.16,75.23 68.53,75.23 U$4.D3
  Bottom 0.61: ENC7.3 56.87,70.75 58.41,69.2
D45
  Bottom 0.406: 59.36,79.23 ENC8.2
  Bottom 0.61: U$4.D4 64.84,72.93 59.36,78.41 59.36,79.23
D46
  Bottom 0.406: U$4.D2 66.11,78.01 61.9,82.22 | 56.82,79.33 ENC8.3
  Bottom 0.61: 61.9,82.22 58.73,82.22 56.82,80.31 56.82,79.33
D47
  Bottom 0.406: 85.71,59.04 72.06,59.04
  Bottom 0.61: D8D3.1 86.3,59.63 85.71,59.04 | 72.06,59.04 71.43,59.68 71.43,61.27 70.16,62.53 69.17,62.53 U$4.D8
D48
  Bottom 0.406: 85.66,57.09 84.76,56.5 71.11,56.5 70.16,55.55 68.7,55.55 U$4.D11
  Bottom 0.61: D8D3.2 85.66,57.09
GND  (via drill 0.6)
  Top 0.61: POWER.2 39.84,37.21 v39.84,36.03 | v36.03,36.03 35.63,35.63 U$1.GND | POWER2.2 39.84,87.21 v39.84,86.03 | v36.03,86.03 35.63,85.63 U$3.GND | POWER1.2 89.84,37.21 v89.84,36.03 | v86.03,36.03 85.63,35.63 U$2.GND | POWER3.2 89.84,87.21 v89.84,86.03 | v86.03,86.03 85.63,85.63 U$4.GND
  other vias: 16.35,9.04 16.35,59.04 66.35,9.04 66.35,59.04
  pour Top (isolate 0.61): -20,128 143,128 143,-35 -20,-35
  pour Bottom (isolate 0.61): 138,124 -25,124 -25,-39 138,-39
N$1
  Bottom 0.813: POWER.1 29.96,42.21 D1.1
N$3
  Bottom 0.813: POWER1.1 79.96,42.21 D2.1
N$4
  Bottom 0.813: POWER2.1 29.96,92.21 D3.1
N$5
  Bottom 0.813: POWER3.1 79.96,92.21 D4.1
RST
  Top 0.61: U$1.RST 36.9,33.09 37.94,34.12 37.94,39.84 32.22,45.55 32.22,47.47 RST.1
RST1
  Top 0.61: U$2.RST 86.9,33.09 87.94,34.12 87.94,39.84 82.22,45.55 82.22,47.47 RST1.1
RST2
  Top 0.61: U$3.RST 36.9,83.09 37.94,84.12 37.94,89.84 32.22,95.56 32.22,97.47 RST2.1
RST3
  Top 0.61: U$4.RST 86.9,83.09 87.94,84.12 87.94,89.84 82.22,95.56 82.22,97.47 RST3.1
RX
  Bottom 0.406: 6.82,43.2 SERIAL.3
  Bottom 0.61: U$1.RX1 16.43,35.63 12.85,39.2 9.36,39.2 6.82,41.74 6.82,43.2
RX1
  Bottom 0.406: 56.82,43.2 SERIAL1.3
  Bottom 0.61: U$2.RX1 66.43,35.63 62.85,39.2 59.36,39.2 56.82,41.74 56.82,43.2
RX2
  Bottom 0.406: 6.82,93.2 SERIAL2.3
  Bottom 0.61: U$3.RX1 16.43,85.63 12.85,89.2 9.36,89.2 6.82,91.75 6.82,93.2
RX3
  Bottom 0.406: 56.82,93.2 SERIAL3.3
  Bottom 0.61: U$4.RX1 66.43,85.63 62.85,89.2 59.36,89.2 56.82,91.75 56.82,93.2
TX
  Bottom 0.406: 9.36,43.2 SERIAL.2
  Bottom 0.61: U$1.TX0 15.48,38.17 13.17,40.48 10.63,40.48 9.36,41.74 9.36,43.2
TX1
  Bottom 0.406: 59.36,43.2 SERIAL1.2
  Bottom 0.61: U$2.TX0 65.48,38.17 63.17,40.48 60.63,40.48 59.36,41.74 59.36,43.2
TX2
  Bottom 0.406: 9.36,93.2 SERIAL2.2
  Bottom 0.61: U$3.TX0 15.48,88.17 13.17,90.47 10.63,90.47 9.36,91.75 9.36,93.2
TX3
  Bottom 0.406: 59.36,93.2 SERIAL3.2
  Bottom 0.61: U$4.TX0 65.48,88.17 63.17,90.47 60.63,90.47 59.36,91.75 59.36,93.2
VCC
  Bottom 0.813: D1.2 29.73,12.34 REG1117-5V.3
VCC1
  Bottom 0.813: D2.2 79.73,12.34 REG1117-5V1.3
VCC2
  Bottom 0.813: D3.2 29.73,62.34 REG1117-5V2.3
VCC3
  Bottom 0.813: D4.2 79.73,62.34 REG1117-5V3.3

## Text on the board
Milling: V-Cut HERE | V-Cut HERE
_tNames: RX | TX | 5V | GND | RX | TX | 5V | GND | RST | MM / ZP | RST | MM / ZP | SERIAL | 3V3 | SERIAL | 3V3 | D1 | D1 | VCC | VCC | GND | SDA | SCL | 5V | GND | SDA | SCL | 5V | I2C | I2C | GND | GND | GND | 2 | 4 | 3V3 | GND | 2 | 4 | 3V3 | 5V | GND | 5V | GND | ENC2 | ENC2 | A7 | A7 | C2 | C2 | A6 | A6 | GND | 3 | 5 | 3V3 | GND | 3 | 5 | 3V3 | ENC1 | A5 | ENC1 | A5 | A4 | A4 | ~ | A3 | ~ | A3 | GND | 9 | 7 | 6 | MOTOR2 | GND | 9 | 7 | 6 | MOTOR2 | A2 | A2 | A1 | A1 | ~ | C1 | A0 | ~ | C1 | A0 | GND | 10 | 12 | 13 | GND | 10 | 12 | 13 | MOTOR1 | MOTOR1 | 8 | 8 | Nano / 328p / USB | 11 | Nano / 328p / USB | 11 | v1 | v1 | Musafir | Motor / Controller | Musafir | Motor / Controller | v2 | v2 | RX | TX | 5V | GND | RX | TX | 5V | GND | RST | MM / ZP | RST | MM / ZP | SERIAL | 3V3 | SERIAL | 3V3 | D1 | D1 | VCC | VCC | GND | SDA | SCL | 5V | GND | SDA | SCL | 5V | I2C | I2C | GND | GND | GND | 2 | 4 | 3V3 | GND | 2 | 4 | 3V3 | 5V | GND | 5V | GND | ENC2 | ENC2 | A7 | A7 | C2 | C2 | A6 | A6 | GND | 3 | 5 | 3V3 | GND | 3 | 5 | 3V3 | ENC1 | A5 | ENC1 | A5 | A4 | A4 | ~ | A3 | ~ | A3 | GND | 9 | 7 | 6 | MOTOR2 | GND | 9 | 7 | 6 | MOTOR2 | A2 | A2 | A1 | A1 | ~ | C1 | A0 | ~ | C1 | A0 | GND | 10 | 12 | 13 | GND | 10 | 12 | 13 | MOTOR1 | MOTOR1 | 8 | 8 | Nano / 328p / USB | 11 | Nano / 328p / USB | 11 | v1 | v1 | Musafir | Motor / Controller | Musafir | Motor / Controller | v2 | v2
_bNames: RX | TX | 5V | RX | TX | 5V | ejaadtech.com | ejaadtech.com | GND | SDA | SCL | 5V | GND | SDA | SCL | 5V | GND | 2 | 4 | 3V3 | GND | 2 | 4 | 3V3 | GND | 3 | 5 | 3V3 | GND | 3 | 5 | 3V3 | ~ | REG1117-3V3 | ~ | REG1117-3V3 | GND | 9 | 7 | 6 | GND | 9 | 7 | 6 | ~ | ~ | GND | 10 | 12 | 13 | GND | 10 | 12 | 13 | REG1117-5V | REG1117-5V | RX | TX | 5V | RX | TX | 5V | ejaadtech.com | ejaadtech.com | GND | SDA | SCL | 5V | GND | SDA | SCL | 5V | GND | 2 | 4 | 3V3 | GND | 2 | 4 | 3V3 | GND | 3 | 5 | 3V3 | GND | 3 | 5 | 3V3 | ~ | REG1117-3V3 | ~ | REG1117-3V3 | GND | 9 | 7 | 6 | GND | 9 | 7 | 6 | ~ | ~ | GND | 10 | 12 | 13 | GND | 10 | 12 | 13 | REG1117-5V | REG1117-5V